# Altium PCB SIK-DIP-board.PcbDoc
Units mil, origin at the board's own origin, x right, y up, seen from the top; angles counter-clockwise.
Board outline 3700 x 2500 mil, 2 copper layers (Top, Bottom); 76 components, 68 nets, 424 pads, 0 vias.
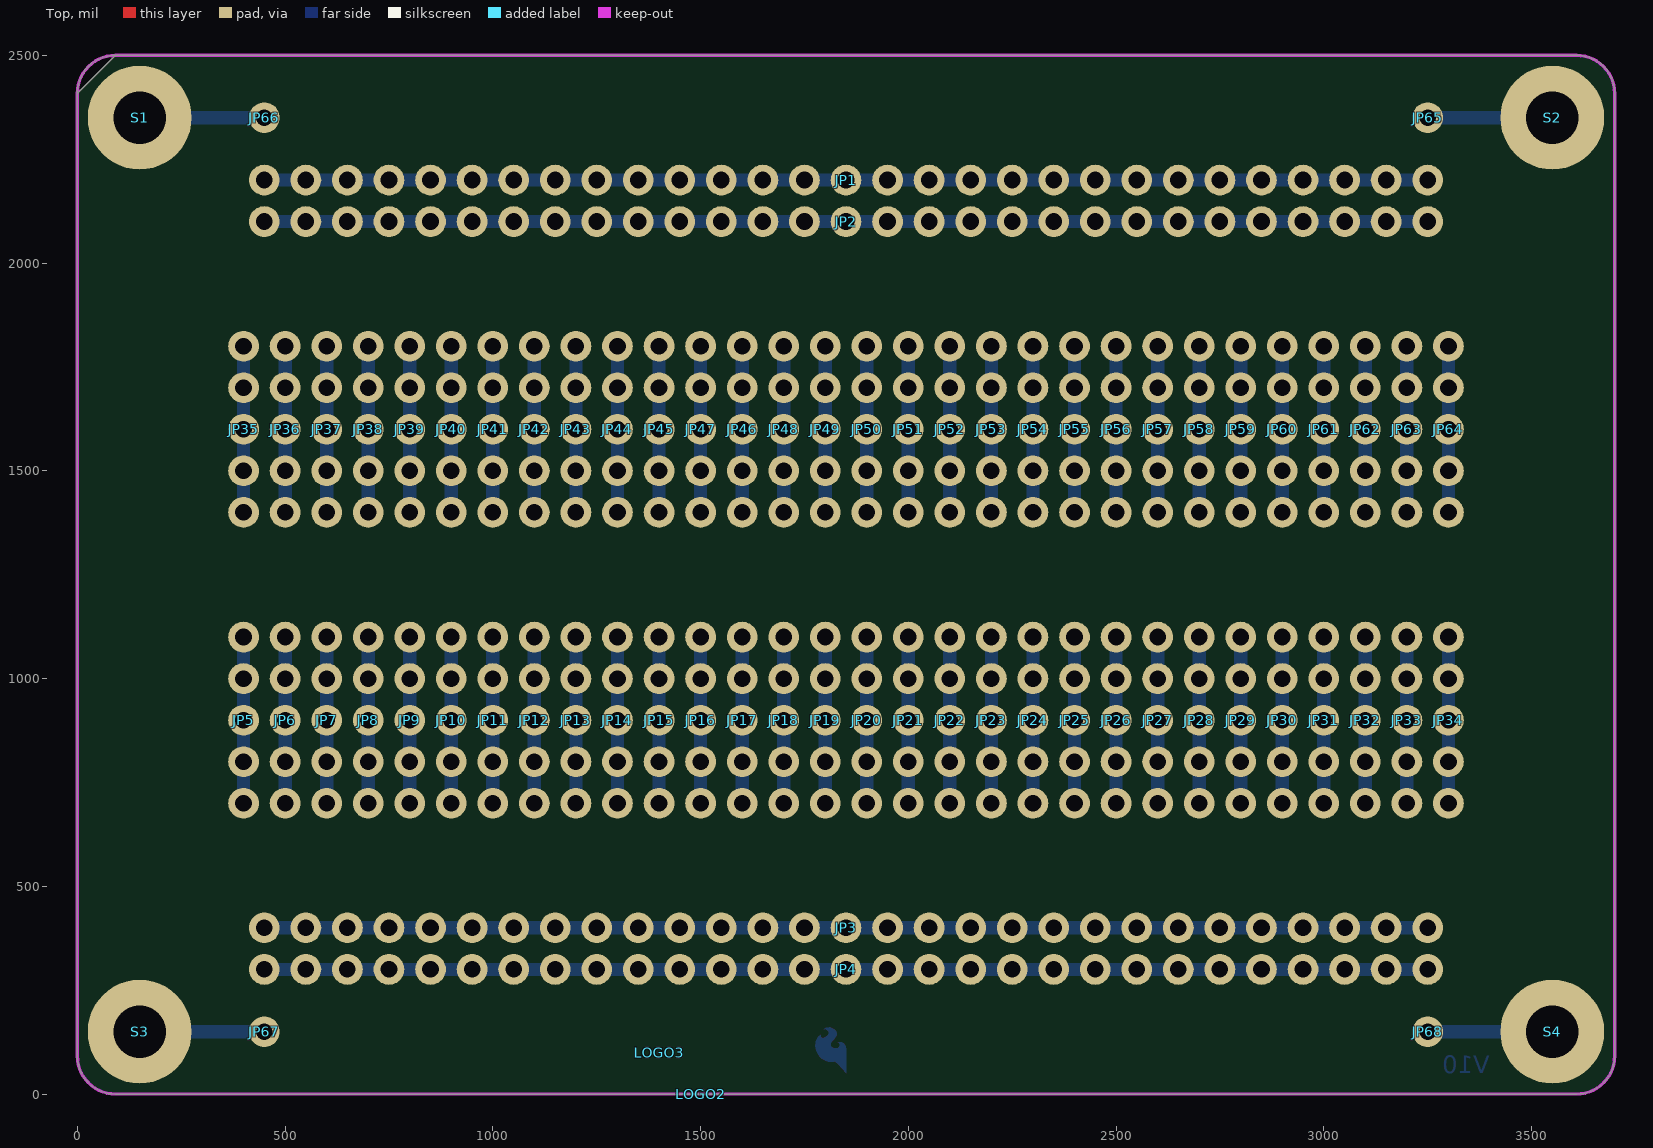
[diagram p0: Top view]
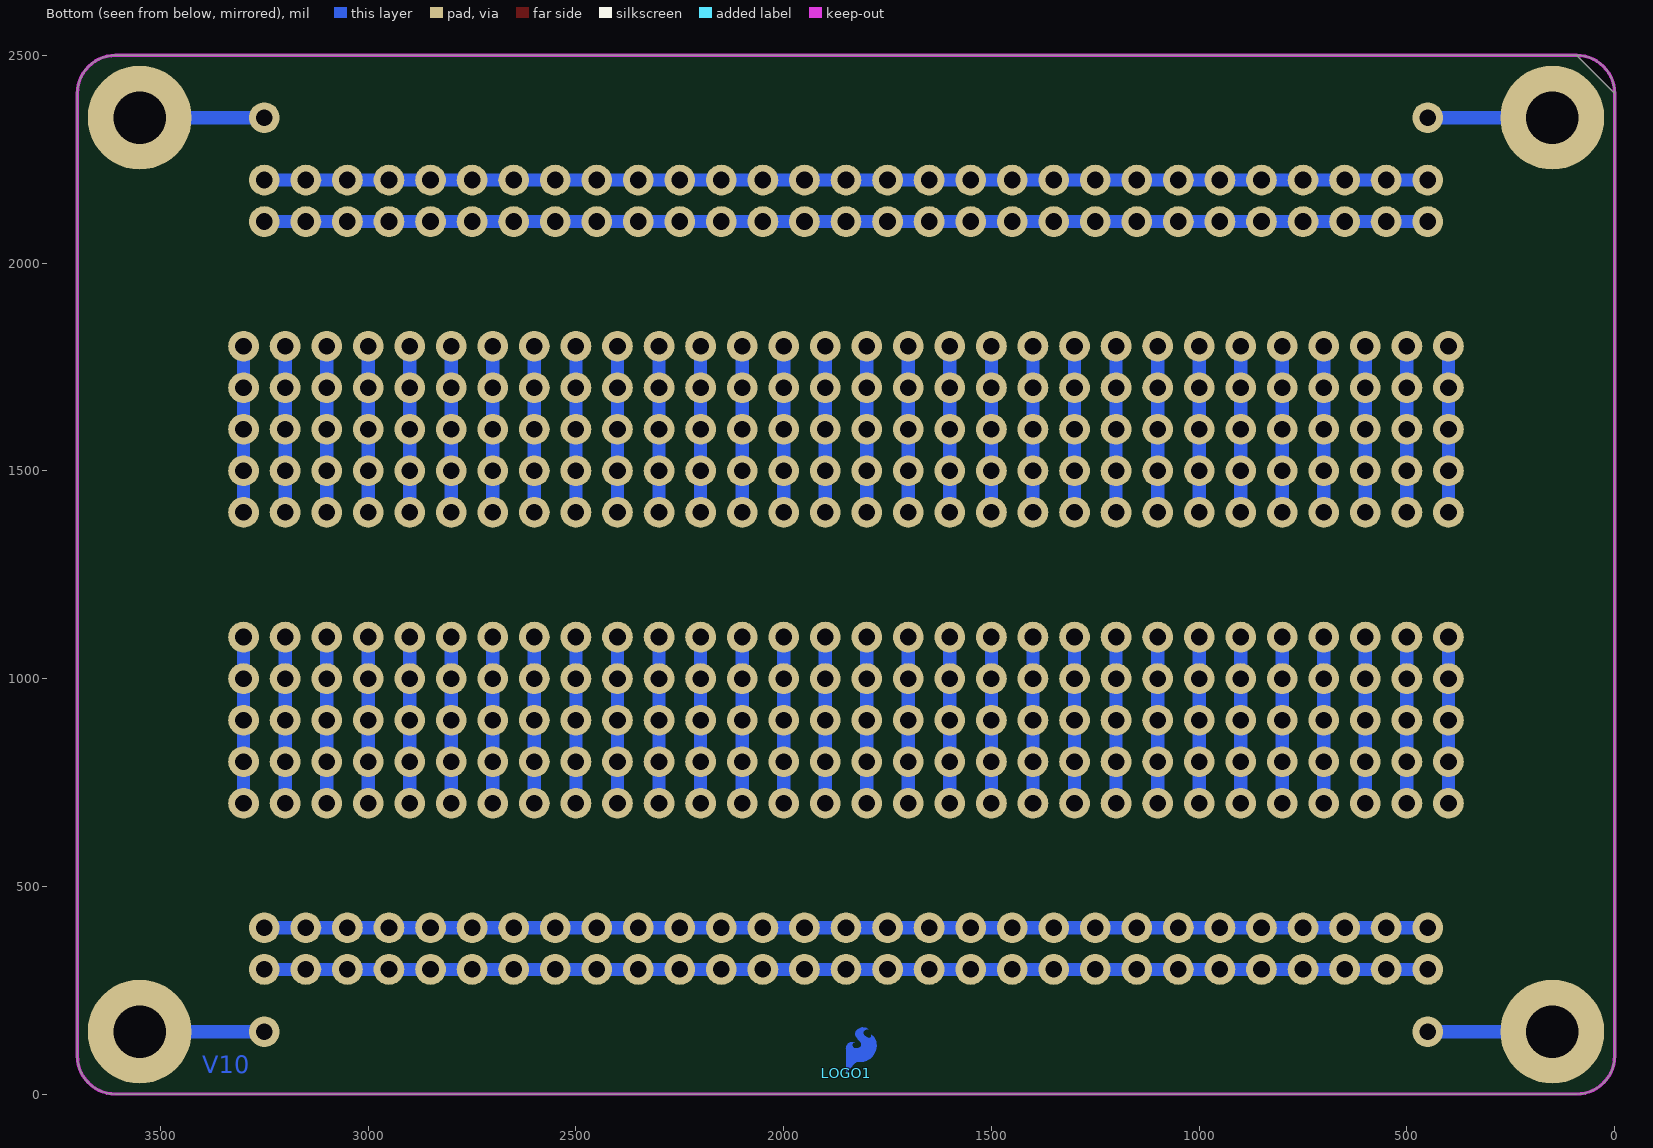
[diagram p1: Bottom view, seen from below]

## Layer stack, top to bottom
Top Solder: solder mask 0.4, Solder Resist, Dk 3.5
Top: signal copper 1.378
Dielectric 1: dielectric 12.6, FR-4, Dk 4.8
Bottom: signal copper 1.378
Bottom Solder: solder mask 0.4, Solder Resist, Dk 3.5

## Board outline
91.42,2500 ccw(c91.42,2408.58) 0,2408.58 0,91.42 ccw(c91.42,91.42) 91.42,0 3608.58,0 ccw(c3608.58,91.42) 3700,91.42 3700,2408.58 ccw(c3608.58,2408.58) 3608.58,2500 91.42,2500 ccw(c91.42,2408.58)

## Design rules (kind name [scope] priority, off if disabled: settings)
BoardOutlineClearance mdCopperDimension [All] p1: gap=10 ignorepadtopadclearanceinfootprint=FALSE except(0: Arc-SplitContinuation Track-SplitContinuation SMDPad-SplitContinuation THPad-SplitContinuation Via-SplitContinuation Fill-SplitContinuation Poly-SplitContinuation Region-SplitContinuation Text-SplitContinuation; 8: Poly-OutlineEdge Poly-CavityEdge Poly-CutoutEdge Poly-SplitBarrior)
Clearance "Clearance (Same Net)" [All] p1: gap=8 ignorepadtopadclearanceinfootprint=FALSE
Clearance [All] p2: gap=8 ignorepadtopadclearanceinfootprint=FALSE
HoleSize [All] p1: absolutevalues=TRUE maxlimit=100000 minlimit=15 maxpercent=80.000 minpercent=20.000
HoleToHoleClearance mdDrill [All] p1: gap=8 allowstackedmicrovias=TRUE
MinimumSolderMaskSliver [All] p1 off: minsoldermaskwidth=10
PasteMaskExpansion mlMinCreamFrame [All] p1: expansion=0
PolygonConnect ThermalVias [IsVia] p1: connectstyle=Direct reliefconductorwidth=10 reliefentries=4 polygonreliefangle="90 Angle" airgapwidth=10
PolygonConnect [All] p2: connectstyle=Relief reliefconductorwidth=10 reliefentries=4 polygonreliefangle="90 Angle" airgapwidth=10
RoutingVias [All] p1: holewidth=15 width=35 viastyle="Through Hole" minholewidth=15 minwidth=35 maxholewidth=100 maxwidth=100
SolderMaskExpansion mlMinStopFrame [All] p1: expansion=4 istentingtop=FALSE
Width [All] p1: maxlimit=10000 minlimit=7 preferedwidth=7
26 further rules are at their usual default settings.

## Components (designator, comment, footprint, x,y, rotation, side; value= is the part's Value field where it differs from the comment)
FRAME1 "" CREATIVE_COMMONS 1050,-400 r0 top
JP1 "" 1X29_NO_SILK 450,2200 r0 top
JP2 "" 1X29_NO_SILK 450,2100 r0 top
JP3 "" 1X29_NO_SILK 450,400 r0 top
JP4 "" 1X29_NO_SILK 450,300 r0 top
JP5 "" 1X05_NO_SILK 400,700 r90 top
JP6 "" 1X05_NO_SILK 500,700 r90 top
JP7 "" 1X05_NO_SILK 600,700 r90 top
JP8 "" 1X05_NO_SILK 700,700 r90 top
JP9 "" 1X05_NO_SILK 800,700 r90 top
JP10 "" 1X05_NO_SILK 900,700 r90 top
JP11 "" 1X05_NO_SILK 1000,700 r90 top
JP12 "" 1X05_NO_SILK 1100,700 r90 top
JP13 "" 1X05_NO_SILK 1200,700 r90 top
JP14 "" 1X05_NO_SILK 1300,700 r90 top
JP15 "" 1X05_NO_SILK 1400,700 r90 top
JP16 "" 1X05_NO_SILK 1500,700 r90 top
JP17 "" 1X05_NO_SILK 1600,700 r90 top
JP18 "" 1X05_NO_SILK 1700,700 r90 top
JP19 "" 1X05_NO_SILK 1800,700 r90 top
JP20 "" 1X05_NO_SILK 1900,700 r90 top
JP21 "" 1X05_NO_SILK 2000,700 r90 top
JP22 "" 1X05_NO_SILK 2100,700 r90 top
JP23 "" 1X05_NO_SILK 2200,700 r90 top
JP24 "" 1X05_NO_SILK 2300,700 r90 top
JP25 "" 1X05_NO_SILK 2400,700 r90 top
JP26 "" 1X05_NO_SILK 2500,700 r90 top
JP27 "" 1X05_NO_SILK 2600,700 r90 top
JP28 "" 1X05_NO_SILK 2700,700 r90 top
JP29 "" 1X05_NO_SILK 2800,700 r90 top
JP30 "" 1X05_NO_SILK 2900,700 r90 top
JP31 "" 1X05_NO_SILK 3000,700 r90 top
JP32 "" 1X05_NO_SILK 3100,700 r90 top
JP33 "" 1X05_NO_SILK 3200,700 r90 top
JP34 "" 1X05_NO_SILK 3300,700 r90 top
JP35 "" 1X05_NO_SILK 400,1400 r90 top
JP36 "" 1X05_NO_SILK 500,1400 r90 top
JP37 "" 1X05_NO_SILK 600,1400 r90 top
JP38 "" 1X05_NO_SILK 700,1400 r90 top
JP39 "" 1X05_NO_SILK 800,1400 r90 top
JP40 "" 1X05_NO_SILK 900,1400 r90 top
JP41 "" 1X05_NO_SILK 1000,1400 r90 top
JP42 "" 1X05_NO_SILK 1100,1400 r90 top
JP43 "" 1X05_NO_SILK 1200,1400 r90 top
JP44 "" 1X05_NO_SILK 1300,1400 r90 top
JP45 "" 1X05_NO_SILK 1400,1400 r90 top
JP46 "" 1X05_NO_SILK 1600,1400 r90 top
JP47 "" 1X05_NO_SILK 1500,1400 r90 top
JP48 "" 1X05_NO_SILK 1700,1400 r90 top
JP49 "" 1X05_NO_SILK 1800,1400 r90 top
JP50 "" 1X05_NO_SILK 1900,1400 r90 top
JP51 "" 1X05_NO_SILK 2000,1400 r90 top
JP52 "" 1X05_NO_SILK 2100,1400 r90 top
JP53 "" 1X05_NO_SILK 2200,1400 r90 top
JP54 "" 1X05_NO_SILK 2300,1400 r90 top
JP55 "" 1X05_NO_SILK 2400,1400 r90 top
JP56 "" 1X05_NO_SILK 2500,1400 r90 top
JP57 "" 1X05_NO_SILK 2600,1400 r90 top
JP58 "" 1X05_NO_SILK 2700,1400 r90 top
JP59 "" 1X05_NO_SILK 2800,1400 r90 top
JP60 "" 1X05_NO_SILK 2900,1400 r90 top
JP61 "" 1X05_NO_SILK 3000,1400 r90 top
JP62 "" 1X05_NO_SILK 3100,1400 r90 top
JP63 "" 1X05_NO_SILK 3200,1400 r90 top
JP64 "" 1X05_NO_SILK 3300,1400 r90 top
JP65 "" 1X01NS 3250,2350 r0 top
JP66 "" 1X01NS 450,2350 r0 top
JP67 "" 1X01NS 450,150 r0 top
JP68 "" 1X01NS 3250,150 r0 top
LOGO1 "" SFE-LOGO-FLAME-COPPER 1850,50 r180 bottom
LOGO2 "" SFE-NEW-WEBLOGO 1500,0 r0 top
LOGO3 "" OSHW-LOGO-S 1400,100 r0 top
S1 "" STANDOFF-ELECTRICAL 150,2350 r0 top
S2 "" STANDOFF-ELECTRICAL 3550,2350 r0 top
S3 "" STANDOFF-ELECTRICAL 150,150 r0 top
S4 "" STANDOFF-ELECTRICAL 3550,150 r0 top

## Footprints (in the part's own frame and the unit in brackets; to place one, negate y for a bottom-side part, rotate by r counter-clockwise, add the part's x,y. Pads: shape width x height; smd on the part's side, far side on the other; paste and mask are expansions set on the pad)
1X01NS [mil] "1X01NS"
  round 74 hole 40: 1(0,0)
  body extent -37,-37 37,37, height 50
1X05_NO_SILK [mil] "1X05_NO_SILK"
  round 74 hole 40: 1(0,0) 2(100,0) 3(200,0) 4(300,0) 5(400,0)
  body extent -37,-37 437,37, height 150
1X29_NO_SILK [mil] "1X29_NO_SILK"
  round 74 hole 40: 1(0,0) 2(100,0) 3(200,0) 4(300,0) 5(400,0) 6(500,0) 7(600,0) 8(700,0) 9(800,0) 10(900,0) 11(1000,0) 12(1100,0) 13(1200,0) 14(1300,0) 15(1400,0) 16(1500,0) 17(1600,0) 18(1700,0) 19(1800,0) 20(1900,0) 21(2000,0) 22(2100,0) 23(2200,0) 24(2300,0) 25(2400,0) 26(2500,0) 27(2600,0) 28(2700,0) 29(2800,0)
  body extent -37,-37 2837,37, height 150
CREATIVE_COMMONS [mil] "CREATIVE_COMMONS"
OSHW-LOGO-S [mil] "OSHW-LOGO-S"
SFE-LOGO-FLAME-COPPER [mil] "SFE-LOGO-FLAME-COPPER"
  Top region: 21.5,74.7 19.6,75 15.9,75.29 12.2,75 12.2,75 6.9,73.01 2.8,69.1 2.8,69.1 0.67,64.67 0,59.8 0,59.8 0,0.1 19.2,21.7 22.62,24.83 26.6,27.2 26.6,27.2 28.07,27.73 29.6,28 29.6,28 38.6,28 46.59,29.1 54,32.3 54,32.3 60.65,37.36 66.1,43.7 66.1,43.7 72.3,57.5 73.2,72.6 73.2,72.6 71.75,78.68 69,84.3 69,84.3 65.43,88.78 61,92.4 61,92.4 61,88.9 60.92,88.33 60.7,87.8 60.7,87.8 59.53,86.35 58,85.3 58,85.3 57.61,85.13 57.2,85 57.2,85 53.82,84.88 50.7,86.2 50.7,86.2 48.89,87.49 47.1,88.8 47.1,88.8 45.43,90.23 44,91.9 44,91.9 42.85,93.77 42,95.8 42,95.8 41.74,97.09 41.8,98.4 41.8,98.4 42.79,101.24 44.71,103.57 47.3,105.1 47.3,105.1 49.32,105.67 51.4,105.9 51.4,105.9 52.6,105.92 53.8,105.9 53.8,105.9 53.8,105.9 53.7,106 51.99,107.33 50,108.2 50,108.2 49.28,108.46 48.6,108.8 48.6,108.8 48.16,109.02 47.7,109.2 47.7,109.2 44.25,110.06 40.7,110.4 40.7,110.4 35.6,109.76 30.9,107.7 30.9,107.7 27.84,105.49 25.1,102.9 25.1,102.9 22.62,98.74 22.06,93.92 23.5,89.3 23.5,89.3 28.17,82.38 33.9,76.3 33.9,76.3 36.21,72.98 36.82,68.98 35.6,65.12 32.8,62.2 32.8,62.2 29.4,60.55 25.7,59.8 25.7,59.8 21.37,60.28 17.5,62.3 17.5,62.3 16.18,63.69 15.3,65.4 15.3,65.4 14.86,68.05 15.3,70.7 15.3,70.7 15.66,71.37 16.2,71.9 16.2,71.9 17.86,73.09 19.5,74.3 19.5,74.3 20.46,74.72 21.5,74.7 21.5,74.7
  body extent 0,0 74,110, height 150
SFE-NEW-WEBLOGO [mil] "SFE-NEW-WEBLOGO"
STANDOFF-ELECTRICAL [mil] "STANDOFF-ELECTRICAL"
  round 250 hole 125.98: P1(0,0)
  body extent -125,-125 125,125, height 50

## Part data
FRAME1: library part CREATIVE_COMMONS, PackageName=CREATIVE_COMMONS
JP1 JP2 JP3 JP4: library part 1X29_NO_SILK, PackageName=1X29_NO_SILK
JP5 JP6 JP7 JP8 JP9 JP10 JP11 JP12 JP13 JP14 JP15 JP16 JP17 JP18 JP19 JP20 JP21 JP22 JP23 JP24 JP25 JP26 JP27 JP28 JP29 JP30 JP31 JP32 JP33 JP34 JP35 JP36 JP37 JP38 JP39 JP40 JP41 JP42 JP43 JP44 JP45 JP46 JP47 JP48 JP49 JP50 JP51 JP52 JP53 JP54 JP55 JP56 JP57 JP58 JP59 JP60 JP61 JP62 JP63 JP64: library part 1X05_NO_SILK, PackageName=1X05_NO_SILK
JP65 JP66 JP67 JP68: library part 1X01NS, PackageName=1X01NS
LOGO1: library part SFE-LOGO-FLAME-COPPER, PackageName=SFE-LOGO-FLAME-COPPER
LOGO2: library part SFE-NEW-WEBLOGO, PackageName=SFE-NEW-WEBLOGO
LOGO3: library part OSHW-LOGO-S, PackageName=OSHW-LOGO-S
S1 S2 S3 S4: library part STANDOFF-ELECTRICAL, PackageName=STANDOFF-ELECTRICAL

## Nets (pads, with @x,y where several pads share a name; then routed paths per layer and width w, separated by ;. In a path a pad name is that pad's centre, name@x,y a point inside that pad or via, vN(x,y) a via of type N, cw(c..) or ccw(c..) an arc to the next point about the centre after c; other vN are vias at no path point)
N$1: JP1.1 JP1.2 JP1.3 JP1.4 JP1.5 JP1.6 JP1.7 JP1.8 JP1.9 JP1.10 JP1.11 JP1.12 JP1.13 JP1.14 JP1.15 JP1.16 JP1.17 JP1.18 JP1.19 JP1.20 JP1.21 JP1.22 JP1.23 JP1.24 JP1.25 JP1.26 JP1.27 JP1.28 JP1.29 | length 2800
  Bottom w32: JP1.1 JP1.2 JP1.3 JP1.4 JP1.5 JP1.6 JP1.7 JP1.8 JP1.9 JP1.10 JP1.11 JP1.12 JP1.13 JP1.14 JP1.15 JP1.16 JP1.17 JP1.18 JP1.19 JP1.20 JP1.21 JP1.22 JP1.23 JP1.24 JP1.25 JP1.26 JP1.27 JP1.28 JP1.29
N$2: JP2.1 JP2.2 JP2.3 JP2.4 JP2.5 JP2.6 JP2.7 JP2.8 JP2.9 JP2.10 JP2.11 JP2.12 JP2.13 JP2.14 JP2.15 JP2.16 JP2.17 JP2.18 JP2.19 JP2.20 JP2.21 JP2.22 JP2.23 JP2.24 JP2.25 JP2.26 JP2.27 JP2.28 JP2.29 | length 2800
  Bottom w32: JP2.1 JP2.2 JP2.3 JP2.4 JP2.5 JP2.6 JP2.7 JP2.8 JP2.9 JP2.10 JP2.11 JP2.12 JP2.13 JP2.14 JP2.15 JP2.16 JP2.17 JP2.18 JP2.19 JP2.20 JP2.21 JP2.22 JP2.23 JP2.24 JP2.25 JP2.26 JP2.27 JP2.28 JP2.29
N$3: JP3.1 JP3.2 JP3.3 JP3.4 JP3.5 JP3.6 JP3.7 JP3.8 JP3.9 JP3.10 JP3.11 JP3.12 JP3.13 JP3.14 JP3.15 JP3.16 JP3.17 JP3.18 JP3.19 JP3.20 JP3.21 JP3.22 JP3.23 JP3.24 JP3.25 JP3.26 JP3.27 JP3.28 JP3.29 | length 2800
  Bottom w32: JP3.1 JP3.2 JP3.3 JP3.4 JP3.5 JP3.6 JP3.7 JP3.8 JP3.9 JP3.10 JP3.11 JP3.12 JP3.13 JP3.14 JP3.15 JP3.16 JP3.17 JP3.18 JP3.19 JP3.20 JP3.21 JP3.22 JP3.23 JP3.24 JP3.25 JP3.26 JP3.27 JP3.28 JP3.29
N$4: JP4.1 JP4.2 JP4.3 JP4.4 JP4.5 JP4.6 JP4.7 JP4.8 JP4.9 JP4.10 JP4.11 JP4.12 JP4.13 JP4.14 JP4.15 JP4.16 JP4.17 JP4.18 JP4.19 JP4.20 JP4.21 JP4.22 JP4.23 JP4.24 JP4.25 JP4.26 JP4.27 JP4.28 JP4.29 | length 2800
  Bottom w32: JP4.1 JP4.2 JP4.3 JP4.4 JP4.5 JP4.6 JP4.7 JP4.8 JP4.9 JP4.10 JP4.11 JP4.12 JP4.13 JP4.14 JP4.15 JP4.16 JP4.17 JP4.18 JP4.19 JP4.20 JP4.21 JP4.22 JP4.23 JP4.24 JP4.25 JP4.26 JP4.27 JP4.28 JP4.29
N$5: JP10.1 JP10.2 JP10.3 JP10.4 JP10.5 | length 400
  Bottom w32: JP10.1 JP10.2 JP10.3 JP10.4 JP10.5
N$6: JP5.1 JP5.2 JP5.3 JP5.4 JP5.5 | length 400
  Bottom w32: JP5.1 JP5.2 JP5.3 JP5.4 JP5.5
N$7: JP6.1 JP6.2 JP6.3 JP6.4 JP6.5 | length 400
  Bottom w32: JP6.1 JP6.2 JP6.3 JP6.4 JP6.5
N$8: JP7.1 JP7.2 JP7.3 JP7.4 JP7.5 | length 400
  Bottom w32: JP7.1 JP7.2 JP7.3 JP7.4 JP7.5
N$9: JP8.1 JP8.2 JP8.3 JP8.4 JP8.5 | length 400
  Bottom w32: JP8.1 JP8.2 JP8.3 JP8.4 JP8.5
N$10: JP9.1 JP9.2 JP9.3 JP9.4 JP9.5 | length 400
  Bottom w32: JP9.1 JP9.2 JP9.3 JP9.4 JP9.5
N$11: JP11.1 JP11.2 JP11.3 JP11.4 JP11.5 | length 400
  Bottom w32: JP11.1 JP11.2 JP11.3 JP11.4 JP11.5
N$12: JP12.1 JP12.2 JP12.3 JP12.4 JP12.5 | length 400
  Bottom w32: JP12.1 JP12.2 JP12.3 JP12.4 JP12.5
N$13: JP13.1 JP13.2 JP13.3 JP13.4 JP13.5 | length 400
  Bottom w32: JP13.1 JP13.2 JP13.3 JP13.4 JP13.5
N$14: JP14.1 JP14.2 JP14.3 JP14.4 JP14.5 | length 400
  Bottom w32: JP14.1 JP14.2 JP14.3 JP14.4 JP14.5
N$15: JP15.1 JP15.2 JP15.3 JP15.4 JP15.5 | length 400
  Bottom w32: JP15.1 JP15.2 JP15.3 JP15.4 JP15.5
N$16: JP16.1 JP16.2 JP16.3 JP16.4 JP16.5 | length 400
  Bottom w32: JP16.1 JP16.2 JP16.3 JP16.4 JP16.5
N$17: JP17.1 JP17.2 JP17.3 JP17.4 JP17.5 | length 400
  Bottom w32: JP17.1 JP17.2 JP17.3 JP17.4 JP17.5
N$18: JP18.1 JP18.2 JP18.3 JP18.4 JP18.5 | length 400
  Bottom w32: JP18.1 JP18.2 JP18.3 JP18.4 JP18.5
N$19: JP19.1 JP19.2 JP19.3 JP19.4 JP19.5 | length 400
  Bottom w32: JP19.1 JP19.2 JP19.3 JP19.4 JP19.5
N$20: JP20.1 JP20.2 JP20.3 JP20.4 JP20.5 | length 400
  Bottom w32: JP20.1 JP20.2 JP20.3 JP20.4 JP20.5
N$21: JP21.1 JP21.2 JP21.3 JP21.4 JP21.5 | length 400
  Bottom w32: JP21.1 JP21.2 JP21.3 JP21.4 JP21.5
N$22: JP22.1 JP22.2 JP22.3 JP22.4 JP22.5 | length 400
  Bottom w32: JP22.1 JP22.2 JP22.3 JP22.4 JP22.5
N$23: JP23.1 JP23.2 JP23.3 JP23.4 JP23.5 | length 400
  Bottom w32: JP23.1 JP23.2 JP23.3 JP23.4 JP23.5
N$24: JP24.1 JP24.2 JP24.3 JP24.4 JP24.5 | length 400
  Bottom w32: JP24.1 JP24.2 JP24.3 JP24.4 JP24.5
N$25: JP25.1 JP25.2 JP25.3 JP25.4 JP25.5 | length 400
  Bottom w32: JP25.1 JP25.2 JP25.3 JP25.4 JP25.5
N$26: JP26.1 JP26.2 JP26.3 JP26.4 JP26.5 | length 400
  Bottom w32: JP26.1 JP26.2 JP26.3 JP26.4 JP26.5
N$27: JP27.1 JP27.2 JP27.3 JP27.4 JP27.5 | length 400
  Bottom w32: JP27.1 JP27.2 JP27.3 JP27.4 JP27.5
N$28: JP28.1 JP28.2 JP28.3 JP28.4 JP28.5 | length 400
  Bottom w32: JP28.1 JP28.2 JP28.3 JP28.4 JP28.5
N$29: JP29.1 JP29.2 JP29.3 JP29.4 JP29.5 | length 400
  Bottom w32: JP29.1 JP29.2 JP29.3 JP29.4 JP29.5
N$30: JP30.1 JP30.2 JP30.3 JP30.4 JP30.5 | length 400
  Bottom w32: JP30.1 JP30.2 JP30.3 JP30.4 JP30.5
N$31: JP31.1 JP31.2 JP31.3 JP31.4 JP31.5 | length 400
  Bottom w32: JP31.1 JP31.2 JP31.3 JP31.4 JP31.5
N$32: JP32.1 JP32.2 JP32.3 JP32.4 JP32.5 | length 400
  Bottom w32: JP32.1 JP32.2 JP32.3 JP32.4 JP32.5
N$33: JP33.1 JP33.2 JP33.3 JP33.4 JP33.5 | length 400
  Bottom w32: JP33.1 JP33.2 JP33.3 JP33.4 JP33.5
N$34: JP34.1 JP34.2 JP34.3 JP34.4 JP34.5 | length 400
  Bottom w32: JP34.1 JP34.2 JP34.3 JP34.4 JP34.5
N$35: JP35.1 JP35.2 JP35.3 JP35.4 JP35.5 | length 400
  Bottom w32: JP35.1 JP35.2 JP35.3 JP35.4 JP35.5
N$36: JP36.1 JP36.2 JP36.3 JP36.4 JP36.5 | length 400
  Bottom w32: JP36.1 JP36.2 JP36.3 JP36.4 JP36.5
N$37: JP37.1 JP37.2 JP37.3 JP37.4 JP37.5 | length 400
  Bottom w32: JP37.1 JP37.2 JP37.3 JP37.4 JP37.5
N$38: JP38.1 JP38.2 JP38.3 JP38.4 JP38.5 | length 400
  Bottom w32: JP38.1 JP38.2 JP38.3 JP38.4 JP38.5
N$39: JP39.1 JP39.2 JP39.3 JP39.4 JP39.5 | length 400
  Bottom w32: JP39.1 JP39.2 JP39.3 JP39.4 JP39.5
N$40: JP40.1 JP40.2 JP40.3 JP40.4 JP40.5 | length 400
  Bottom w32: JP40.1 JP40.2 JP40.3 JP40.4 JP40.5
N$41: JP41.1 JP41.2 JP41.3 JP41.4 JP41.5 | length 400
  Bottom w32: JP41.1 JP41.2 JP41.3 JP41.4 JP41.5
N$42: JP42.1 JP42.2 JP42.3 JP42.4 JP42.5 | length 400
  Bottom w32: JP42.1 JP42.2 JP42.3 JP42.4 JP42.5
N$43: JP43.1 JP43.2 JP43.3 JP43.4 JP43.5 | length 400
  Bottom w32: JP43.1 JP43.2 JP43.3 JP43.4 JP43.5
N$44: JP44.1 JP44.2 JP44.3 JP44.4 JP44.5 | length 400
  Bottom w32: JP44.1 JP44.2 JP44.3 JP44.4 JP44.5
N$45: JP45.1 JP45.2 JP45.3 JP45.4 JP45.5 | length 400
  Bottom w32: JP45.1 JP45.2 JP45.3 JP45.4 JP45.5
N$46: JP46.1 JP46.2 JP46.3 JP46.4 JP46.5 | length 400
  Bottom w32: JP46.1 JP46.2 JP46.3 JP46.4 JP46.5
N$47: JP47.1 JP47.2 JP47.3 JP47.4 JP47.5 | length 400
  Bottom w32: JP47.1 JP47.2 JP47.3 JP47.4 JP47.5
N$48: JP48.1 JP48.2 JP48.3 JP48.4 JP48.5 | length 400
  Bottom w32: JP48.1 JP48.2 JP48.3 JP48.4 JP48.5
N$49: JP49.1 JP49.2 JP49.3 JP49.4 JP49.5 | length 400
  Bottom w32: JP49.1 JP49.2 JP49.3 JP49.4 JP49.5
N$50: JP50.1 JP50.2 JP50.3 JP50.4 JP50.5 | length 400
  Bottom w32: JP50.1 JP50.2 JP50.3 JP50.4 JP50.5
N$51: JP51.1 JP51.2 JP51.3 JP51.4 JP51.5 | length 400
  Bottom w32: JP51.1 JP51.2 JP51.3 JP51.4 JP51.5
N$52: JP52.1 JP52.2 JP52.3 JP52.4 JP52.5 | length 400
  Bottom w32: JP52.1 JP52.2 JP52.3 JP52.4 JP52.5
N$53: JP53.1 JP53.2 JP53.3 JP53.4 JP53.5 | length 400
  Bottom w32: JP53.1 JP53.2 JP53.3 JP53.4 JP53.5
N$54: JP54.1 JP54.2 JP54.3 JP54.4 JP54.5 | length 400
  Bottom w32: JP54.1 JP54.2 JP54.3 JP54.4 JP54.5
N$55: JP55.1 JP55.2 JP55.3 JP55.4 JP55.5 | length 400
  Bottom w32: JP55.1 JP55.2 JP55.3 JP55.4 JP55.5
N$56: JP56.1 JP56.2 JP56.3 JP56.4 JP56.5 | length 400
  Bottom w32: JP56.1 JP56.2 JP56.3 JP56.4 JP56.5
N$57: JP57.1 JP57.2 JP57.3 JP57.4 JP57.5 | length 400
  Bottom w32: JP57.1 JP57.2 JP57.3 JP57.4 JP57.5
N$58: JP58.1 JP58.2 JP58.3 JP58.4 JP58.5 | length 400
  Bottom w32: JP58.1 JP58.2 JP58.3 JP58.4 JP58.5
N$59: JP59.1 JP59.2 JP59.3 JP59.4 JP59.5 | length 400
  Bottom w32: JP59.1 JP59.2 JP59.3 JP59.4 JP59.5
N$60: JP60.1 JP60.2 JP60.3 JP60.4 JP60.5 | length 400
  Bottom w32: JP60.1 JP60.2 JP60.3 JP60.4 JP60.5
N$61: JP61.1 JP61.2 JP61.3 JP61.4 JP61.5 | length 400
  Bottom w32: JP61.1 JP61.2 JP61.3 JP61.4 JP61.5
N$62: JP62.1 JP62.2 JP62.3 JP62.4 JP62.5 | length 400
  Bottom w32: JP62.1 JP62.2 JP62.3 JP62.4 JP62.5
N$63: JP63.1 JP63.2 JP63.3 JP63.4 JP63.5 | length 400
  Bottom w32: JP63.1 JP63.2 JP63.3 JP63.4 JP63.5
N$64: JP64.1 JP64.2 JP64.3 JP64.4 JP64.5 | length 400
  Bottom w32: JP64.1 JP64.2 JP64.3 JP64.4 JP64.5
N$65: JP65.1 S2.P1 | length 300
  Bottom w32: JP65.1 S2.P1
N$66: JP66.1 S1.P1 | length 300
  Bottom w32: S1.P1 JP66.1
N$67: JP67.1 S3.P1 | length 300
  Bottom w32: S3.P1 JP67.1
N$68: JP68.1 S4.P1 | length 300
  Bottom w32: JP68.1 S4.P1

## Keep-outs
Keep-Out Layer:
  the board outline again, w8

## Other copper
Bottom:
  text "V10" at 3400,50 h42.5

## Silkscreen, mask and mechanical layers (free items; w line width, h text height)
Dimension:
  the board outline again, w8
Top Value:
  text "Byron Jacquot" at 2100,-400 h108.5
tPlace:
  lines w8: 225,275 275,275 ; 225,2075 275,2075 ; 275,225 275,275 ; 275,325 275,275 ; 275,375 275,475 ; 275,2025 275,2075 ; 275,2125 275,2075 ; 275,2175 275,2275 ; 325,275 275,275 ; 325,2075 275,2075 ; 450,225 3250,225 ; 450,475 3250,475 ; 450,2025 3250,2025 ; 450,2275 3250,2275 ; 3375,275 3425,275 ; 3375,2075 3425,2075 ; 3425,225 3425,275 ; 3425,325 3425,275 ; 3425,375 3425,475 ; 3425,2025 3425,2075 ; 3425,2125 3425,2075 ; 3425,2175 3425,2275 ; 3475,275 3425,275 ; 3475,2075 3425,2075
  text "PTH-protoboard-30" at 1100,2350 h85
  text "1" at 425,1888.26 h47.6 r90
  text "2" at 525,1880.33 h47.6 r90
  text "3" at 625,1880.33 h47.6 r90
  text "4" at 725,1880.33 h47.6 r90
  text "5" at 825,1880.33 h47.6 r90
  text "6" at 925,1880.33 h47.6 r90
  text "7" at 1025,1880.33 h47.6 r90
  text "8" at 1125,1880.33 h47.6 r90
  text "9" at 1225,1880.33 h47.6 r90
  text "11" at 1425,1868.43 h47.6 r90
  text "21" at 2425,1864.47 h47.6 r90
  text "10" at 1325,1860.5 h47.6 r90
  text "12" at 1525,1860.5 h47.6 r90
  text "13" at 1625,1860.5 h47.6 r90
  text "14" at 1725,1860.5 h47.6 r90
  text "15" at 1825,1860.5 h47.6 r90
  text "16" at 1925,1860.5 h47.6 r90
  text "17" at 2025,1860.5 h47.6 r90
  text "18" at 2125,1860.5 h47.6 r90
  text "19" at 2225,1860.5 h47.6 r90
  text "20" at 2325,1856.54 h47.6 r90
  text "22" at 2525,1856.54 h47.6 r90
  text "23" at 2625,1856.54 h47.6 r90
  text "24" at 2725,1856.54 h47.6 r90
  text "25" at 2825,1856.54 h47.6 r90
  text "26" at 2925,1856.54 h47.6 r90
  text "27" at 3025,1856.54 h47.6 r90
  text "28" at 3125,1856.54 h47.6 r90
  text "29" at 3225,1856.54 h47.6 r90
  text "30" at 3325,1856.54 h47.6 r90
  text "j" at 300,1788.26 h47.6 r90
  text "j" at 3450,1788.26 h47.6 r90
  text "i" at 300,1688.26 h47.6 r90
  text "i" at 3450,1688.26 h47.6 r90
  text "h" at 300,1580.33 h47.6 r90
  text "h" at 3450,1580.33 h47.6 r90
  text "g" at 300,1480.33 h47.6 r90
  text "g" at 3450,1480.33 h47.6 r90
  text "f" at 300,1388.26 h47.6 r90
  text "f" at 3450,1388.26 h47.6 r90
  text "e" at 300,1080.33 h47.6 r90
  text "e" at 3450,1080.33 h47.6 r90
  text "d" at 300,980.33 h47.6 r90
  text "d" at 3450,980.33 h47.6 r90
  text "c" at 300,880.33 h47.6 r90
  text "c" at 3450,880.33 h47.6 r90
  text "b" at 300,780.33 h47.6 r90
  text "b" at 3450,780.33 h47.6 r90
  text "a" at 300,680.33 h47.6 r90
  text "a" at 3450,680.33 h47.6 r90
  text "1" at 425,588.26 h47.6 r90
  text "2" at 525,580.33 h47.6 r90
  text "3" at 625,580.33 h47.6 r90
  text "4" at 725,580.33 h47.6 r90
  text "5" at 825,580.33 h47.6 r90
  text "6" at 925,580.33 h47.6 r90
  text "7" at 1025,580.33 h47.6 r90
  text "8" at 1125,580.33 h47.6 r90
  text "9" at 1225,580.33 h47.6 r90
  text "11" at 1425,568.43 h47.6 r90
  text "21" at 2425,564.47 h47.6 r90
  text "10" at 1325,560.5 h47.6 r90
  text "12" at 1525,560.5 h47.6 r90
  text "13" at 1625,560.5 h47.6 r90
  text "14" at 1725,560.5 h47.6 r90
  text "15" at 1825,560.5 h47.6 r90
  text "16" at 1925,560.5 h47.6 r90
  text "17" at 2025,560.5 h47.6 r90
  text "18" at 2125,560.5 h47.6 r90
  text "19" at 2225,560.5 h47.6 r90
  text "20" at 2325,556.54 h47.6 r90
  text "22" at 2525,556.54 h47.6 r90
  text "23" at 2625,556.54 h47.6 r90
  text "24" at 2725,556.54 h47.6 r90
  text "25" at 2825,556.54 h47.6 r90
  text "26" at 2925,556.54 h47.6 r90
  text "27" at 3025,556.54 h47.6 r90
  text "28" at 3125,556.54 h47.6 r90
  text "29" at 3225,556.54 h47.6 r90
  text "30" at 3325,556.54 h47.6 r90
bPlace:
  lines w8: 225,275 275,275 ; 225,2075 275,2075 ; 275,225 275,275 ; 275,325 275,275 ; 275,375 275,475 ; 275,2025 275,2075 ; 275,2125 275,2075 ; 275,2175 275,2275 ; 325,275 275,275 ; 325,2075 275,2075 ; 450,225 3250,225 ; 450,475 3250,475 ; 450,2025 3250,2025 ; 450,2275 3250,2275 ; 3375,275 3425,275 ; 3375,2075 3425,2075 ; 3425,225 3425,275 ; 3425,325 3425,275 ; 3425,2025 3425,2075 ; 3425,2125 3425,2075 ; 3425,2175 3425,2275 ; 3475,275 3425,275 ; 3475,2075 3425,2075
  text "PTH-protoboard-30" at 2600,2350 h85
  text "20" at 2325,1943.46 h47.6 r90
  text "22" at 2525,1943.46 h47.6 r90
  text "23" at 2625,1943.46 h47.6 r90
  text "24" at 2725,1943.46 h47.6 r90
  text "25" at 2825,1943.46 h47.6 r90
  text "26" at 2925,1943.46 h47.6 r90
  text "27" at 3025,1943.46 h47.6 r90
  text "28" at 3125,1943.46 h47.6 r90
  text "29" at 3225,1943.46 h47.6 r90
  text "30" at 3325,1943.46 h47.6 r90
  text "10" at 1325,1939.5 h47.6 r90
  text "12" at 1525,1939.5 h47.6 r90
  text "13" at 1625,1939.5 h47.6 r90
  text "14" at 1725,1939.5 h47.6 r90
  text "15" at 1825,1939.5 h47.6 r90
  text "16" at 1925,1939.5 h47.6 r90
  text "17" at 2025,1939.5 h47.6 r90
  text "18" at 2125,1939.5 h47.6 r90
  text "19" at 2225,1939.5 h47.6 r90
  text "21" at 2425,1935.53 h47.6 r90
  text "11" at 1425,1931.57 h47.6 r90
  text "2" at 525,1919.67 h47.6 r90
  text "3" at 625,1919.67 h47.6 r90
  text "4" at 725,1919.67 h47.6 r90
  text "5" at 825,1919.67 h47.6 r90
  text "6" at 925,1919.67 h47.6 r90
  text "7" at 1025,1919.67 h47.6 r90
  text "8" at 1125,1919.67 h47.6 r90
  text "9" at 1225,1919.67 h47.6 r90
  text "1" at 425,1911.74 h47.6 r90
  text "j" at 300,1815.07 h47.6 r90
  text "j" at 3450,1815.07 h47.6 r90
  text "i" at 300,1715.07 h47.6 r90
  text "i" at 3450,1715.07 h47.6 r90
  text "h" at 300,1623 h47.6 r90
  text "h" at 3450,1623 h47.6 r90
  text "g" at 300,1523 h47.6 r90
  text "g" at 3450,1523 h47.6 r90
  text "f" at 300,1415.07 h47.6 r90
  text "f" at 3450,1415.07 h47.6 r90
  text "e" at 300,1123 h47.6 r90
  text "e" at 3450,1123 h47.6 r90
  text "d" at 300,1023 h47.6 r90
  text "d" at 3450,1023 h47.6 r90
  text "c" at 300,923 h47.6 r90
  text "c" at 3450,923 h47.6 r90
  text "b" at 300,823 h47.6 r90
  text "b" at 3450,823 h47.6 r90
  text "a" at 300,723 h47.6 r90
  text "a" at 3450,723 h47.6 r90
  text "20" at 2325,643.46 h47.6 r90
  text "22" at 2525,643.46 h47.6 r90
  text "23" at 2625,643.46 h47.6 r90
  text "24" at 2725,643.46 h47.6 r90
  text "25" at 2825,643.46 h47.6 r90
  text "26" at 2925,643.46 h47.6 r90
  text "27" at 3025,643.46 h47.6 r90
  text "28" at 3125,643.46 h47.6 r90
  text "29" at 3225,643.46 h47.6 r90
  text "30" at 3325,643.46 h47.6 r90
  text "10" at 1325,639.5 h47.6 r90
  text "12" at 1525,639.5 h47.6 r90
  text "13" at 1625,639.5 h47.6 r90
  text "14" at 1725,639.5 h47.6 r90
  text "15" at 1825,639.5 h47.6 r90
  text "16" at 1925,639.5 h47.6 r90
  text "17" at 2025,639.5 h47.6 r90
  text "18" at 2125,639.5 h47.6 r90
  text "19" at 2225,639.5 h47.6 r90
  text "21" at 2425,635.53 h47.6 r90
  text "11" at 1425,631.57 h47.6 r90
  text "2" at 525,619.67 h47.6 r90
  text "3" at 625,619.67 h47.6 r90
  text "4" at 725,619.67 h47.6 r90
  text "5" at 825,619.67 h47.6 r90
  text "6" at 925,619.67 h47.6 r90
  text "7" at 1025,619.67 h47.6 r90
  text "8" at 1125,619.67 h47.6 r90
  text "9" at 1225,619.67 h47.6 r90
  text "1" at 425,611.74 h47.6 r90

## Text inside footprints (layer, text, board x,y; h text height)
FRAME1: Top Value "Designed by:" at 1500,-400 h108.5; Top Value "http://creativecommons.org/licenses/by-sa/3.0" at 1050,-300 h108.5; Top Value "Released under the Creative Commons Attribution Share-Alike 3.0 License" at 250,-200 h108.5